# EAGLE board schema_mpb1_1 (EAGLE 9.0.1)
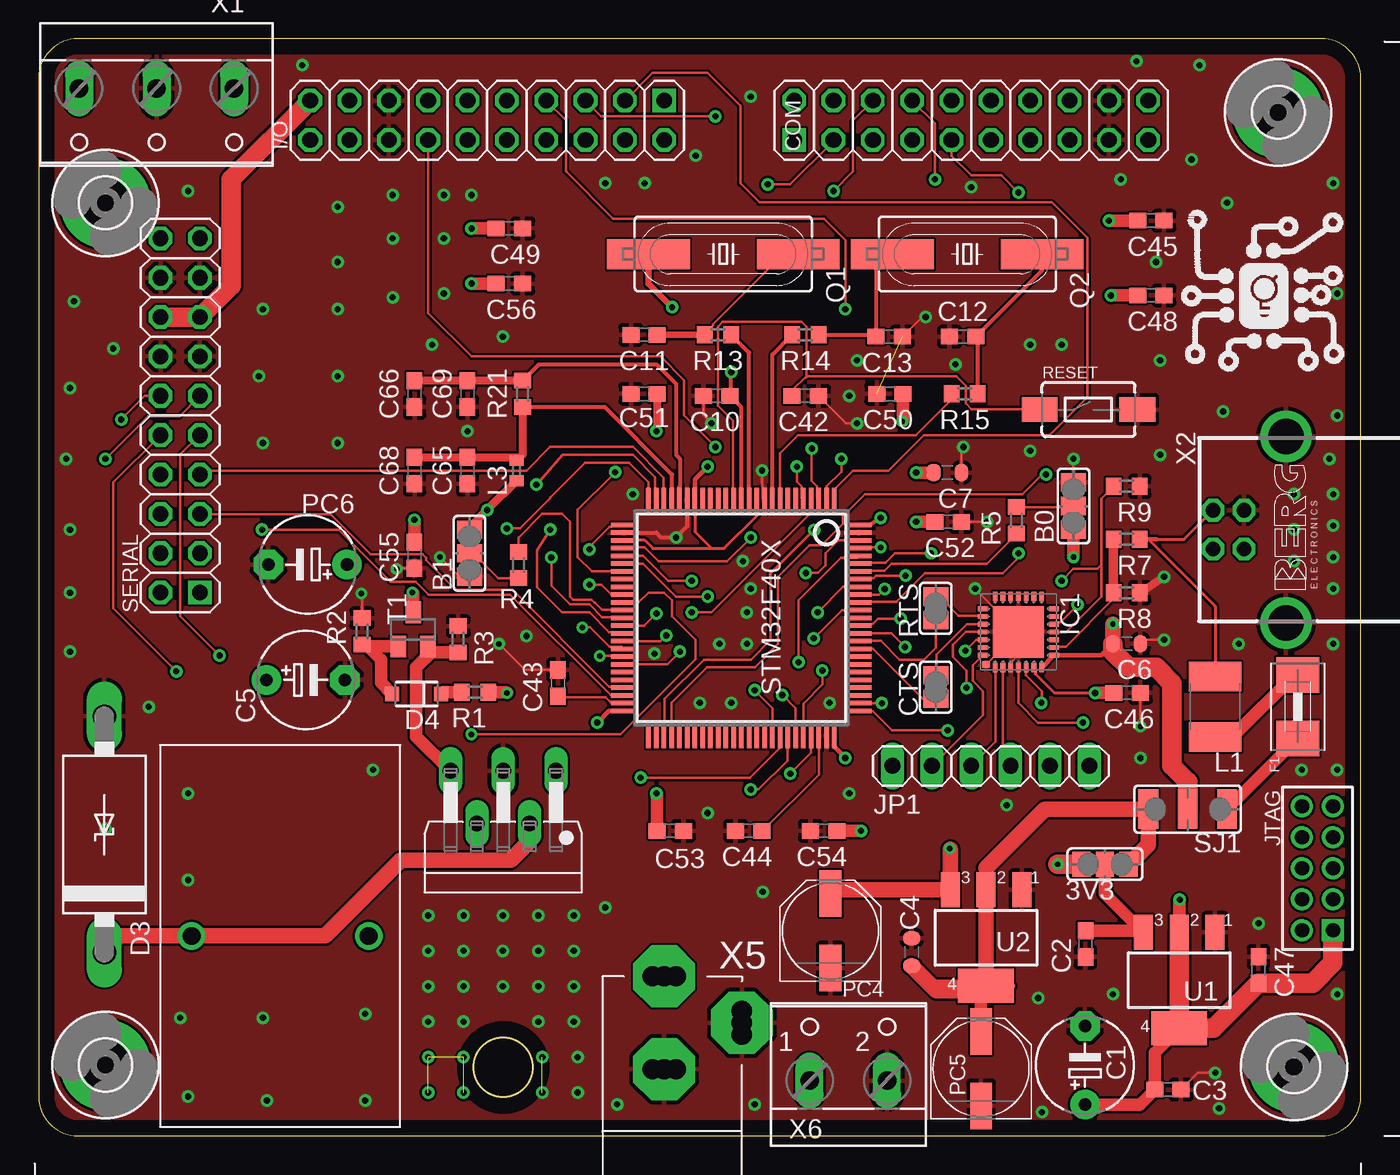
[diagram p0: board, top side]
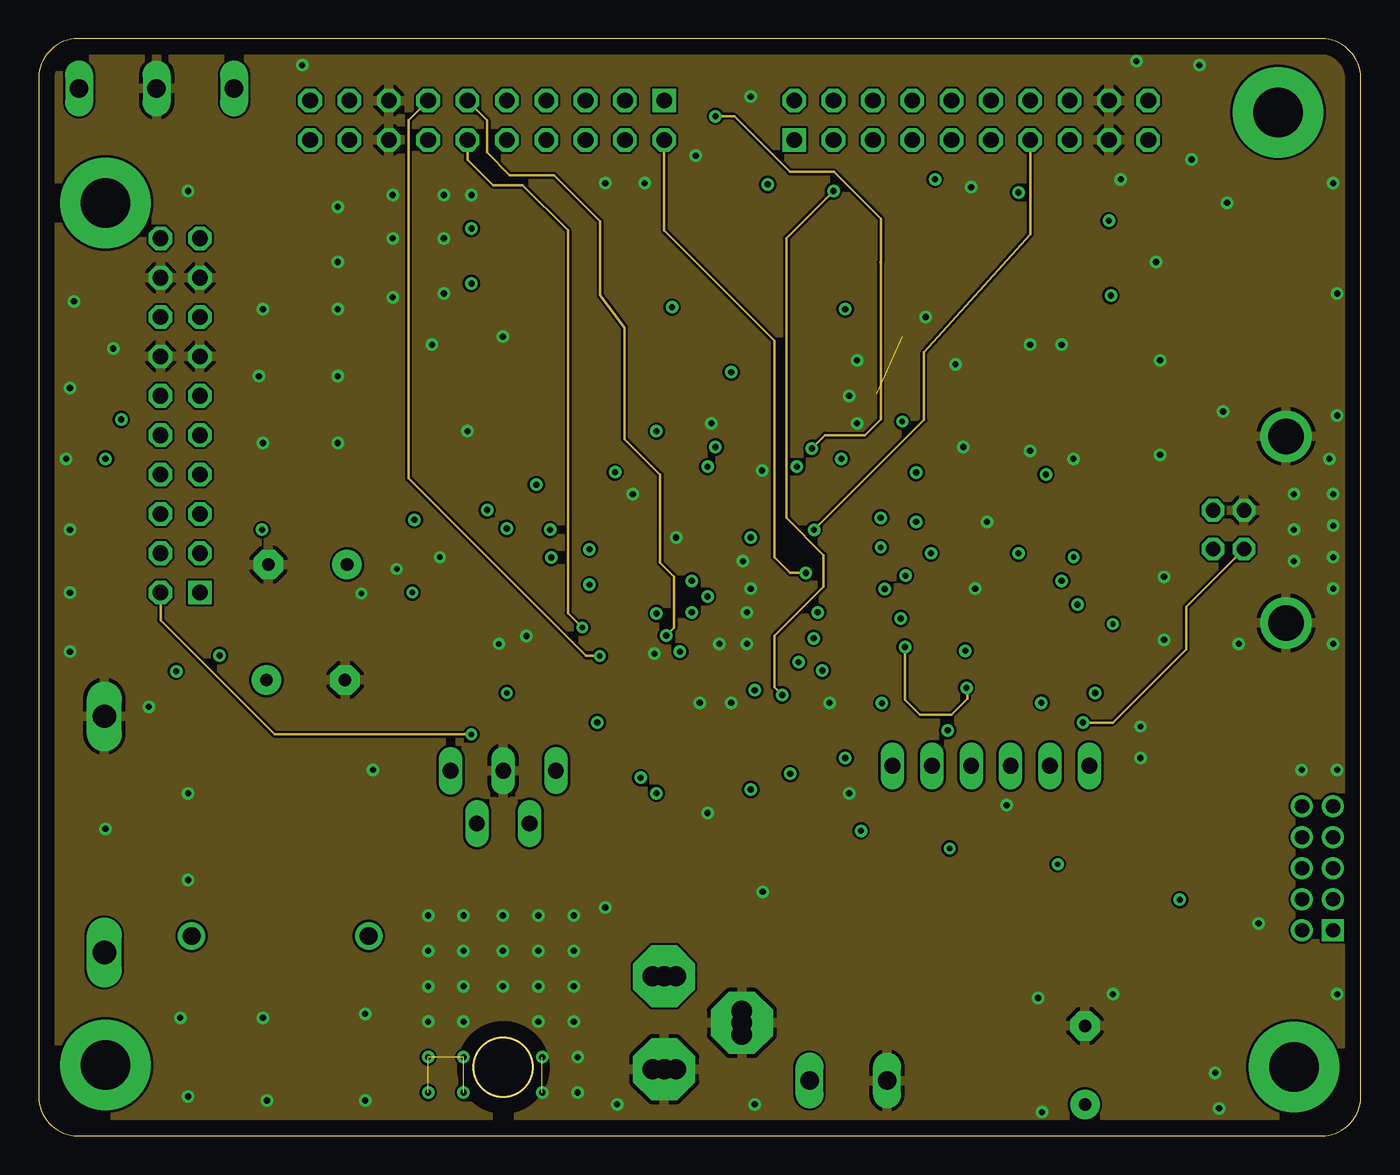
[diagram p1: board, inner layer GND]
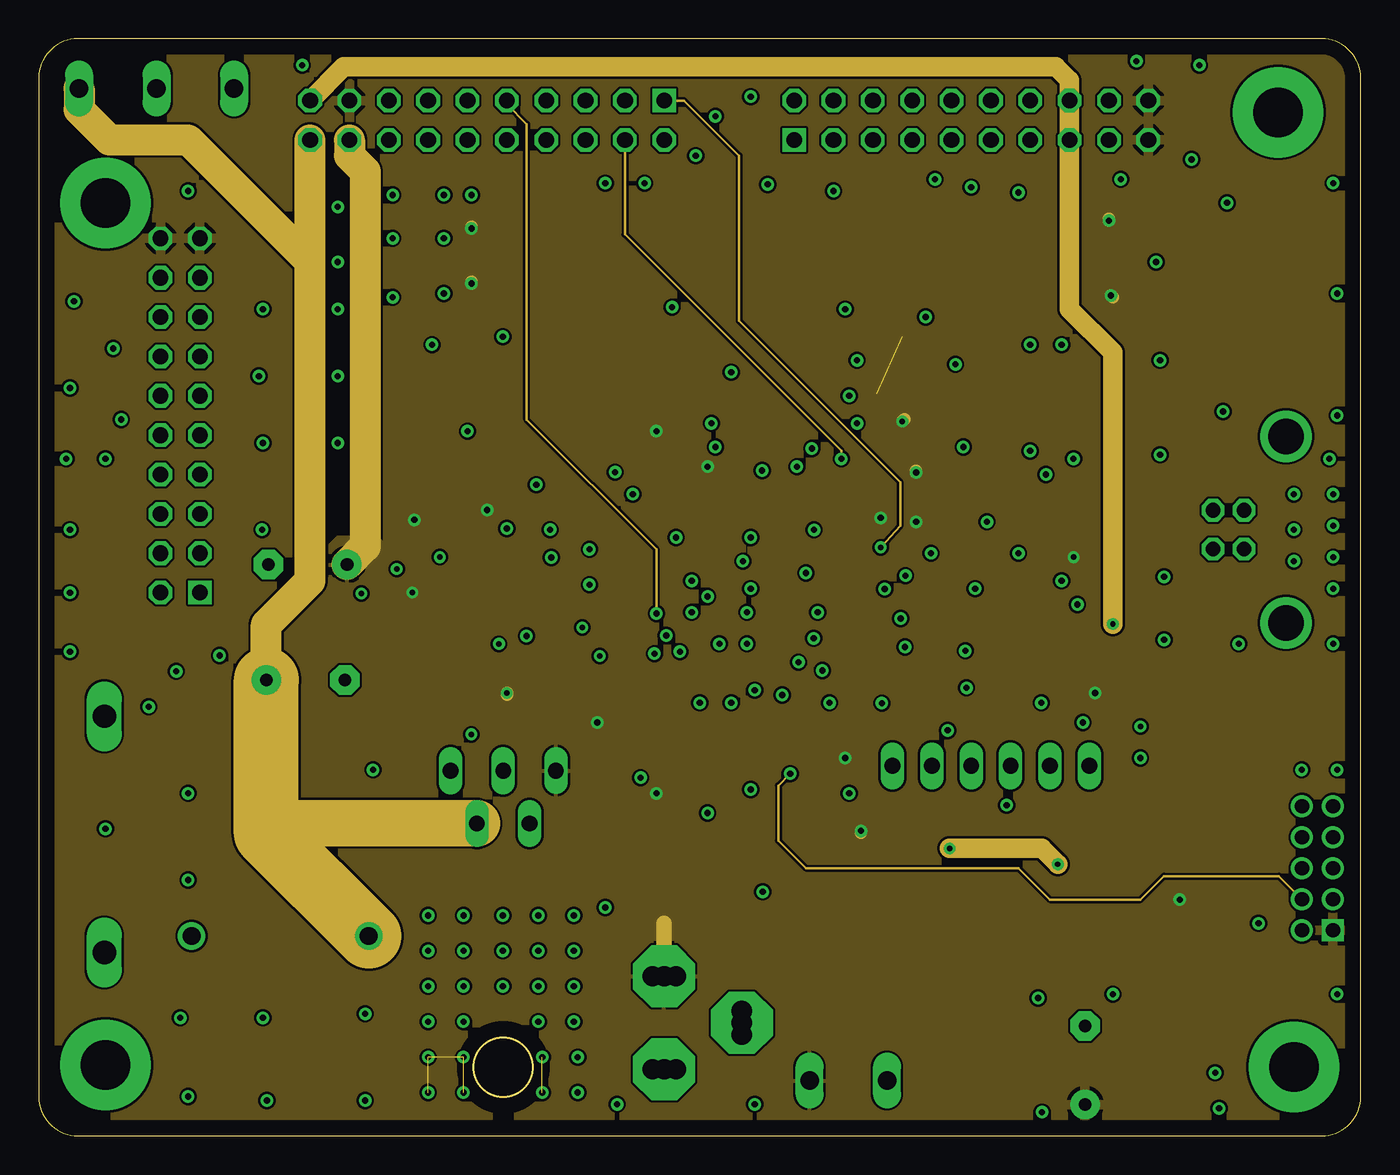
[diagram p2: board, inner layer 3.3V]
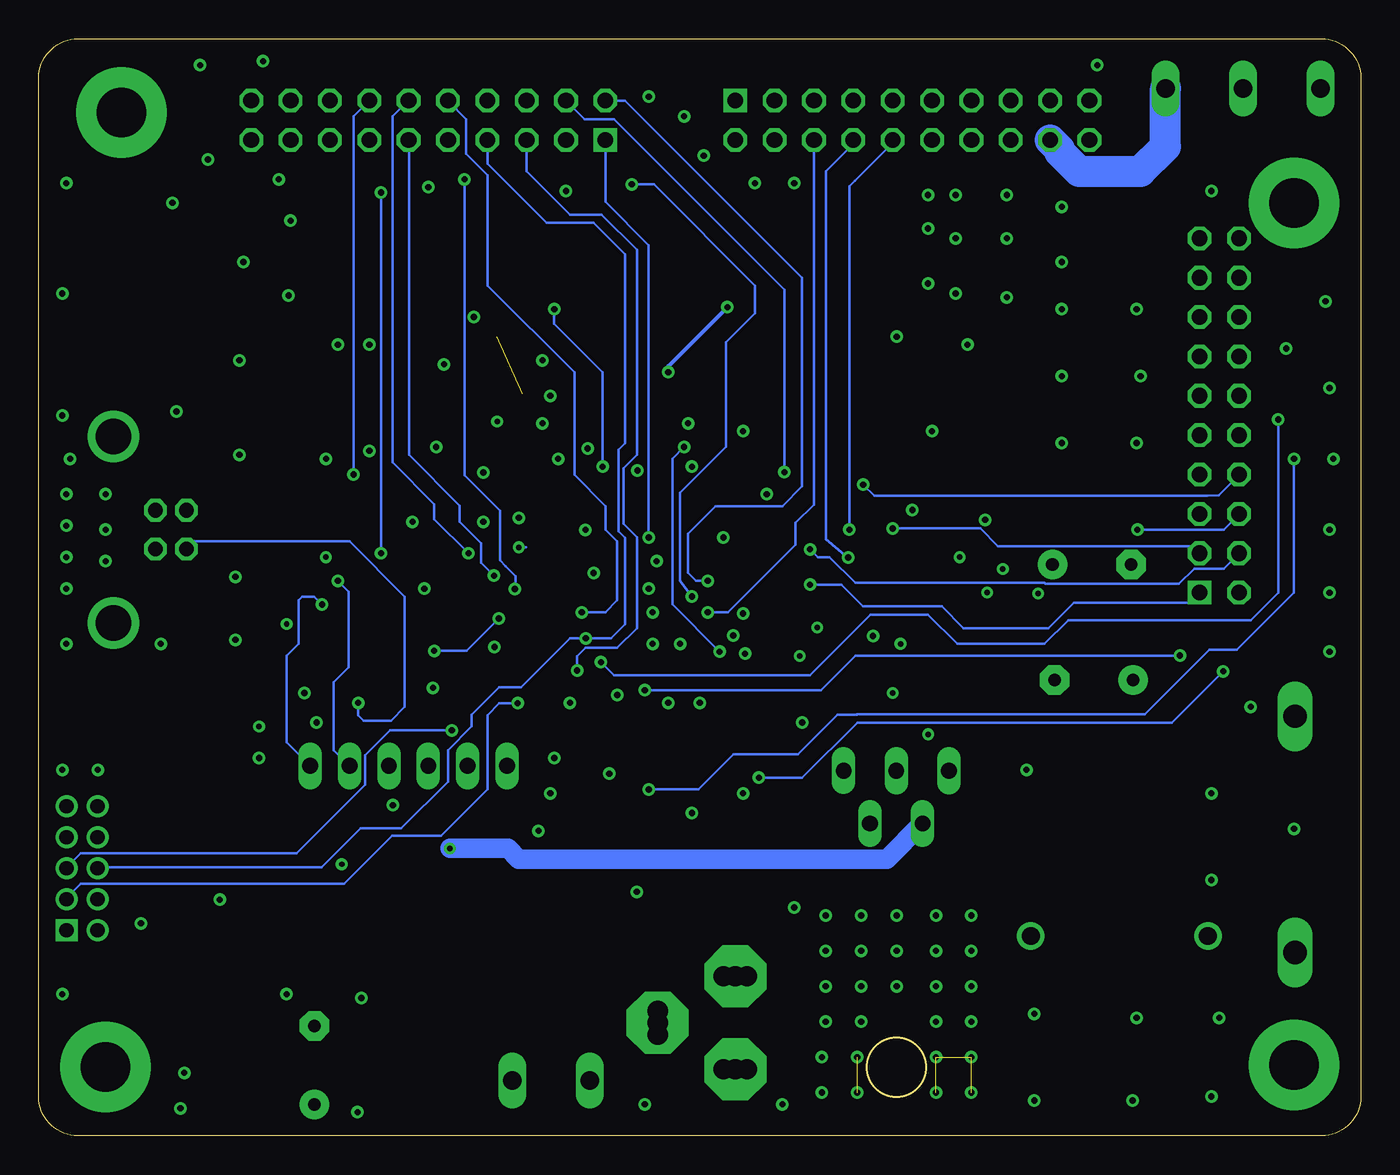
[diagram p3: board, bottom side, seen from below]

Size 85.33 x 70.79 mm. Coordinates in mm from the lower left corner, seen from the top.
Outline: 0,68.25 0,2.54 arc90 2.54,0 82.79,0 arc90 85.33,2.54 85.33,68.25 arc90 82.79,70.79 2.54,70.79 arc90 0,68.25
Copper layers (1+2*15+16): Top 0.035mm / dielectric 0.18mm / GND 0.017mm / dielectric 1.12mm / 3.3V 0.017mm / dielectric 0.18mm / Bottom 0.035mm
Design rules "default *": minimum track width 6mil, minimum drill 0.35mm, track to track 6mil, track to pad 6mil, pad to pad 6mil, via to via 6mil, smd to smd 6mil, copper to edge 40mil, drill to drill 6mil, minimum pad ring 10mil, minimum via ring 8mil, stop-mask expansion 4mil, vias tented up to drill 0mil, thermal gap 10mil
Net classes: 1 power: width 0.152 mm, drill 0.152 mm, clearance 0.152 mm; 2 gnd: width 0.152 mm, drill 0.152 mm, clearance 0.152 mm; 3 power usb: width 0.152 mm, drill 0.152 mm, clearance 0.152 mm

## Footprints (pad centres in the part's own frame; a part is rotated, then mirrored left to right if it is on the bottom)
SJ_2 = smd 1.168 x 1.6: 1 -1.524,0; 2 0,0; 3 1.524,0
E5-6 = drill 0.813 pad 1.905: + -2.54,0 | drill 0.813 pad 1.905 octagon: - 2.54,0
C0603 = smd 1.1 x 1: 1 -0.85,0; 2 0.85,0
C0603-ROUND = smd 0.898 x 1.1: 1 -0.889,0; 2 0.889,0
2X10 = drill 1.016 square: 1 -11.43,-1.27 | drill 1.016 octagon: 2 -11.43,1.27; 3 -8.89,-1.27; 4 -8.89,1.27; 5 -6.35,-1.27; 6 -6.35,1.27; 7 -3.81,-1.27; 8 -3.81,1.27; 9 -1.27,-1.27; 10 -1.27,1.27; 11 1.27,-1.27; 12 1.27,1.27; 13 3.81,-1.27; 14 3.81,1.27; 15 6.35,-1.27; 16 6.35,1.27; 17 8.89,-1.27; 18 8.89,1.27; 19 11.43,-1.27; 20 11.43,1.27
SJ = smd 1.168 x 1.6: 1 -0.762,0; 2 0.762,0
C4111-15 = drill 1.499 long: A 7.62,0; C -7.62,0
SOD-123 = smd 0.9 x 0.95: A 1.575,0; C -1.575,0
1812 = smd 2.286 x 2.794: 1 -2.046,0; 2 2.046,0
3,2-PAD = drill 3.2 pad 5.842: B3,2 0,0
MLP28 = smd 0.6 x 0.3: 1 -2.3,1.5; 2 -2.3,1; 3 -2.3,0.5; 4 -2.3,0; 5 -2.3,-0.5; 6 -2.3,-1; 7 -2.3,-1.5; 15 2.3,-1.5; 16 2.3,-1; 17 2.3,-0.5; 18 2.3,0; 19 2.3,0.5; 20 2.3,1; 21 2.3,1.5 | smd 0.3 x 0.6: 8 -1.5,-2.3; 9 -1,-2.3; 10 -0.5,-2.3; 11 0,-2.3; 12 0.5,-2.3; 13 1,-2.3; 14 1.5,-2.3; 22 1.5,2.3; 23 1,2.3; 24 0.5,2.3; 25 0,2.3; 26 -0.5,2.3; 27 -1,2.3; 28 -1.5,2.3 | smd 3.3 x 3.3: EXP 0,0 | smd 0.435 x 0.435: M -2.103,2.103
1X06 = drill 1.016 long: 1 -6.35,0; 2 -3.81,0; 3 -1.27,0; 4 1.27,0; 5 3.81,0; 6 6.35,0
2X05M = drill 0.914 square: 1 -4,-1 | drill 0.914: 2 -4,1; 3 -2,-1; 4 -2,1; 5 0,-1; 6 0,1; 7 2,-1; 8 2,1; 9 4,-1; 10 4,1
L1812 = smd 1.9 x 3.4: 1 -1.95,0; 2 1.95,0
KM-4.0 = drill 1.143 pad 1.778: P$1 -5.715,0; P$2 5.715,0
0402 = smd 0.7 x 0.9: 1 -0.65,0; 2 0.65,0
TO220-5_STAGGERED = drill 1.016 long: P$1 -3.396,-3.404; P$2 -1.7,-0.002; P$3 0.004,-3.4; P$4 1.7,0.002; P$5 3.404,-3.396
PANASONIC_D = smd 3 x 1.4: + 2.4,0; - -2.4,0
HC49UP = smd 5.334 x 1.93: 1 -4.826,0; 2 4.826,0
R0603 = smd 1 x 1.1: 1 -0.85,0; 2 0.85,0
TACTILE-SWITCH-1101NE = smd 2.3 x 1.6: 1 -3.15,0; 2 3.15,0
PAD-JUMPER-3-NO_YES_SILK_FULL_BOX_WIDE_SPACING = smd 1.27 x 2.54: 1 -2.54,0; 2 0,0; 3 2.54,0
SOT23 = smd 1 x 1.4: 1 -0.95,-1.1; 2 0.95,-1.1; 3 0,1.1
SOT223 = smd 1.219 x 2.235: 1 -2.311,-3.099; 2 0,-3.099; 3 2.311,-3.099 | smd 3.6 x 2.2: 4 0,3.099
LQFP100 = smd 1.6 x 0.3: 1 -7.6,6; 2 -7.6,5.5; 3 -7.6,5; 4 -7.6,4.5; 5 -7.6,4; 6 -7.6,3.5; 7 -7.6,3; 8 -7.6,2.5; 9 -7.6,2; 10 -7.6,1.5; 11 -7.6,1; 12 -7.6,0.5; 13 -7.6,0; 14 -7.6,-0.5; 15 -7.6,-1; 16 -7.6,-1.5; 17 -7.6,-2; 18 -7.6,-2.5; 19 -7.6,-3; 20 -7.6,-3.5; 21 -7.6,-4; 22 -7.6,-4.5; 23 -7.6,-5; 24 -7.6,-5.5; 25 -7.6,-6; 51 7.6,-6; 52 7.6,-5.5; 53 7.6,-5; 54 7.6,-4.5; 55 7.6,-4; 56 7.6,-3.5; 57 7.6,-3; 58 7.6,-2.5; 59 7.6,-2; 60 7.6,-1.5; 61 7.6,-1; 62 7.6,-0.5; 63 7.6,0; 64 7.6,0.5; 65 7.6,1; 66 7.6,1.5; 67 7.6,2; 68 7.6,2.5; 69 7.6,3; 70 7.6,3.5; 71 7.6,4; 72 7.6,4.5; 73 7.6,5; 74 7.6,5.5; 75 7.6,6 | smd 0.3 x 1.6: 26 -6,-7.6; 27 -5.5,-7.6; 28 -5,-7.6; 29 -4.5,-7.6; 30 -4,-7.6; 31 -3.5,-7.6; 32 -3,-7.6; 33 -2.5,-7.6; 34 -2,-7.6; 35 -1.5,-7.6; 36 -1,-7.6; 37 -0.5,-7.6; 38 0,-7.6; 39 0.5,-7.6; 40 1,-7.6; 41 1.5,-7.6; 42 2,-7.6; 43 2.5,-7.6; 44 3,-7.6; 45 3.5,-7.6; 46 4,-7.6; 47 4.5,-7.6; 48 5,-7.6; 49 5.5,-7.6; 50 6,-7.6; 76 6,7.6; 77 5.5,7.6; 78 5,7.6; 79 4.5,7.6; 80 4,7.6; 81 3.5,7.6; 82 3,7.6; 83 2.5,7.6; 84 2,7.6; 85 1.5,7.6; 86 1,7.6; 87 0.5,7.6; 88 0,7.6; 89 -0.5,7.6; 90 -1,7.6; 91 -1.5,7.6; 92 -2,7.6; 93 -2.5,7.6; 94 -3,7.6; 95 -3.5,7.6; 96 -4,7.6; 97 -4.5,7.6; 98 -5,7.6; 99 -5.5,7.6; 100 -6,7.6
W237-103 = drill 1.194 long: 1 -5,-1.29; 2 0,-1.29; 3 5,-1.29
PN61729-S = drill 0.95 octagon: 1 1.25,4.71; 2 -1.25,4.71; 3 -1.25,2.71; 4 1.25,2.71 | drill 2.3 pad 2.9: S1 -6.02,0; S2 6.02,0
POWERSUPPLY_DC-21MM = drill 1.3 pad 4 octagon: 1 -5.08,-3.353; 2 -0.076,-6.35; 3 -0.076,-0.356 | drill 1.3: 4 -5.08,-4.115; 5 -5.08,-2.591; 6 -0.838,-0.356; 7 0.686,-0.356; 8 -0.838,-6.35; 9 0.686,-6.35
W237-102 = drill 1.194 long: 1 -2.5,-1.27; 2 2.5,-1.27

## Placement (x,y rotation side)
3V3  [SJ_2]  68.82,17.53 180 top
B0  [SJ_2]  66.79,40.64 90 top
B1  [SJ_2]  27.8,37.59 270 top
C1  1000uF  [E5-6]  67.53,4.56 90 top
C2  47uF  [C0603]  67.56,12.39 270 top
C3  47uF  [C0603]  72.88,2.98 0 top
C4  100n  [C0603-ROUND]  56.33,11.86 270 top
C5  1000uF 25V  [E5-6]  17.23,29.42 0 top
C6  1uF  [C0603-ROUND]  70.22,31.75 0 top
C7  100nF  [C0603-ROUND]  58.66,42.8 0 top
C10  20pF  [C0603]  43.77,47.75 180 top
C11  20pF  [C0603]  39.07,51.69 180 top
C12  2pF  [C0603]  59.64,51.56 180 top
C13  2pF  [C0603]  54.89,51.56 0 top
C42  100nF  [C0603]  49.48,47.75 180 top
C43  100nF  [C0603]  33.52,29.21 90 top
C44  100nF  [C0603]  45.84,19.68 180 top
C45  100nF  [C0603]  71.78,59.05 0 top
C46  100nF  [C0603]  70.26,28.57 0 top
C47  100nF  [C0603]  78.73,10.71 90 top
C48  100nF  [C0603]  71.78,54.23 0 top
C49  100nF  [C0603]  30.38,58.55 0 top
C50  100nF  [C0603]  54.94,47.88 180 top
C51  100nF  [C0603]  39.07,47.88 180 top
C52  100nF  [C0603]  58.7,39.62 0 top
C53  100nF  [C0603]  40.76,19.68 0 top
C54  100nF  [C0603]  50.66,19.68 180 top
C55  100nF  [C0603]  24.25,37.47 270 top
C56  100nF  [C0603]  30.38,54.99 0 top
C65  100nF  [C0603]  27.68,42.93 270 top
C66  100nF  [C0603]  24.25,47.88 270 top
C68  1uF  [C0603]  24.25,42.93 270 top
C69  1uF  [C0603]  27.68,47.88 270 top
COM  [2X10]  60.19,65.53 0 top
CTS  [SJ]  57.9,28.96 270 top
D3  [C4111-15]  4.24,19.45 90 top
D4  27V  [SOD-123]  24.39,28.5 180 top
F1  500mA  [1812]  81.27,27.69 90 top
H1  MOUNT-PAD-ROUND3.2  [3,2-PAD]  81.02,4.45 90 top
H2  MOUNT-PAD-ROUND3.2  [3,2-PAD]  4.31,4.57 90 top
H3  MOUNT-PAD-ROUND3.2  [3,2-PAD]  4.31,60.2 90 top
H4  MOUNT-PAD-ROUND3.2  [3,2-PAD]  80,66.04 90 top
I/O  [2X10]  28.95,65.53 180 top
IC1  CP2102  [MLP28]  63.24,32.51 90 top
JP1  [1X06]  61.46,23.88 180 top
JTAG  [2X05M]  82.54,17.27 90 top
L1  [L1812]  75.94,27.69 90 top
L2  220uH 50Hz  [KM-4.0]  15.58,12.9 0 top
L3  BLM15HB121SN1  [0402]  30.85,42.93 90 top
LM2576-12V1  [TO220-5_STAGGERED]  29.98,20.16 180 top
PC4  47u  [PANASONIC_D]  51.11,13.23 90 top
PC5  47u  [PANASONIC_D]  60.83,4.34 90 top
PC6  100uF 25V  [E5-6]  17.36,36.86 180 top
Q1  8M  [HC49UP]  44.19,56.9 0 top
Q2  32.768kHz  [HC49UP]  59.93,56.9 0 top
R1  20k  [R0603]  28.17,28.63 0 top
R2  10k  [R0603]  20.87,32.55 270 top
R3  20k  [R0603]  27.08,32.04 270 top
R4  10K  [R0603]  30.98,36.83 90 top
R5  10K  [R0603]  63.11,39.71 270 top
R7  4k7  [R0603]  70.22,38.48 180 top
R8  10k  [R0603]  70.22,35.05 180 top
R9  10k  [R0603]  70.22,41.91 180 top
R13  390  [R0603]  43.84,51.69 0 top
R14  0  [R0603]  49.48,51.69 180 top
R15  0  [R0603]  59.77,47.88 180 top
R21  0  [R0603]  31.23,47.88 270 top
RESET  SWITCH-MOMENTARY-2SMD-1101NE  [TACTILE-SWITCH-1101NE]  67.76,46.86 0 top
RTS  [SJ]  57.9,34.04 270 top
SERIAL  [2X10]  9.13,46.48 90 top
SJ1  JUMPER-PAD-3-NO  [PAD-JUMPER-3-NO_YES_SILK_FULL_BOX_WIDE_SPACING]  74.16,21.08 180 top
T1  [SOT23]  24.17,32.68 0 top
U1  NCP1117ST33T3G  [SOT223]  73.61,10.04 180 top
U2  NCP1117ST50T3G  [SOT223]  61.15,12.78 180 top
U$2  STM32F40XSTM32D40X  [LQFP100]  45.35,33.42 270 top
X1  [W237-103]  7.61,66.29 180 top
X2  PN61729-S  [PN61729-S]  80.51,39.12 90 top
X5  POWERSUPPLY_DC21MMX  [POWERSUPPLY_DC-21MM]  40.3,3.94 180 top
X6  [W237-102]  52.26,4.84 0 top

## Library data of the parts
3V3 B0 B1 CTS RTS = jumper
C1 C5 F1 PC6 = adafruit
C2 C3 L1 PC4 PC5 R1-R3 = rcl
C4 C6 C7 X5 = SmartPrj
C10-C13 C42-C56 C65 C66 C68 C69 R7-R9 R13-R15 R21 = resistor
COM I/O JTAG SERIAL = pinhead-2
D3 = diode
D4 = SparkFun-DiscreteSemi; PROD_ID: DIO-12440; VALUE: 16V
H1-H4 = holes
IC1 = silabs-2
JP1 = pinhead
L2 = inductor_Noyle
L3 = inductors
LM2576-12V1 = LM2576
Q1 Q2 = crystal; OC_FARNELL: unknown; OC_NEWARK: unknown
R4 R5 = rcl; SPICEPREFIX: R
RESET = SparkFun-Electromechanical; PROD_ID: SWCH-00815
SJ1 = SparkFun-Passives
T1 = semicon-smd-ipc
U1 U2 = linear
U$2 = stm32f
X1 = con-wago-500; MPN: 237-103; OC_FARNELL: unknown; OC_NEWARK: 18M7116
X2 = con-berg; OC_FARNELL: unknown; OC_NEWARK: unknown
X6 = con-wago-500; MPN: 237-102; OC_FARNELL: unknown; OC_NEWARK: 70K9898

## Nets
3.3V [power]: B0.1 B1.1 C1.+ C3.1 C7.1 C45.1 C46.1 C47.1 C48.1 C49.1 C50.1 C51.1 C52.1 C53.1 C54.1 C55.1 C56.1 COM.19 COM.20 I/O.17 IC1.6 JTAG.1 L3.1 SERIAL.19 SERIAL.20 U1.2 U1.4 U$2.11 U$2.19 U$2.28 U$2.50 U$2.75 U$2.100
+5V [power usb]: C6.1 COM.15 COM.16 I/O.19 IC1.7 IC1.8 SERIAL.15 SERIAL.16 SJ1.2
+12V: 3V3.3 C5.+ I/O.20 L2.P$2 LM2576-12V1.P$4 PC4.+ U2.3 X1.3
BOOT0: R5.2 U$2.94
BOOT1: R4.2 U$2.37
CAN1_RX: COM.6 U$2.70
CAN1_TX: COM.5 U$2.71
ESP_RX: COM.8 U$2.91
ESP_TX: COM.7 JTAG.6 U$2.89
ETH_MISO: COM.3 U$2.31
ETH_MOSI: COM.4 U$2.32
ETH_SCK: COM.2 U$2.30
ETH_SS: COM.1 U$2.29
GND [gnd]: B0.3 B1.3 C1.- C2.2 C3.2 C4.1 C5.- C6.2 C7.2 C10.2 C11.2 C12.2 C13.2 C42.1 C43.2 C44.2 C45.2 C46.2 C47.2 C48.2 C49.2 C50.2 C51.2 C52.2 C53.2 C54.2 C55.2 C56.2 C65.2 C66.2 C68.2 C69.2 COM.17 COM.18 D3.A I/O.15 I/O.16 IC1.3 IC1.EXP IC1.M LM2576-12V1.P$3 PC4.- PC5.- PC6.- R2.1 R3.1 R8.1 R9.1 RESET.2 SERIAL.13 SERIAL.14 SERIAL.17 SERIAL.18 U1.1 U2.1 U$2.10 U$2.20 U$2.27 U$2.74 U$2.99 X1.2 X2.4 X2.S1 X2.S2 X5.1 X5.3 X6.2
N$1: D3.C L2.P$1 LM2576-12V1.P$2
N$2: D4.A R2.2 T1.1
N$3: D4.C R1.1
N$4 [gnd]: LM2576-12V1.P$5 R3.2 T1.2
N$5: B1.2 R4.1
N$6: B0.2 R5.1
N$8: IC1.9 R7.2 R8.2
N$9: C11.1 Q1.2 R13.1
N$10: C12.1 Q2.2 R15.1
N$11: IC1.2 JP1.3
N$12: C13.1 Q2.1 R14.1
N$13: IC1.5 X2.2
N$14: IC1.4 X2.3
N$15: JTAG.9
N$16: C44.1 U$2.73
N$17: L1.2 R7.1 X2.1
N$18: F1.2 L1.1
N$19: IC1.1 JP1.4
N$20: C43.1 U$2.49
N$21: IC1.11 JP1.2 R9.2
N$24: JTAG.8
N$25: JTAG.10
N$26: IC1.12 JP1.1
N$27: IC1.28 JP1.5
N$41: CTS.1 IC1.24
N$44: IC1.23 RTS.1
N$45: 3V3.2 C2.1 U1.3
NRF_RX: COM.11 U$2.93
NRF_TX: COM.10 U$2.92
PB4: COM.9 U$2.90
PB8: COM.12 U$2.95
PB12: U$2.51
PB13: U$2.52
PC0: U$2.15
PC1: U$2.16
PC2: U$2.17
PC3: U$2.18
PC4: U$2.33
PC5: U$2.34
PC6: U$2.63
PC7: U$2.64
PC13: U$2.7
PC14: R15.2 U$2.8
PC15: R14.2 U$2.9
PD0: U$2.81
PD1: U$2.82
PD7: U$2.88
PD8: U$2.55
PD9: U$2.56
PD10: U$2.57
PD11: U$2.58
PD12: U$2.59
PD13: U$2.60
PD14: U$2.61
PD15: U$2.62
PE0: I/O.1 U$2.97
PE1: I/O.2 U$2.98
PE2: I/O.3 U$2.1
PE3: I/O.4 U$2.2
PE4: I/O.5 U$2.3
PE5: I/O.6 U$2.4
PE6: I/O.7 U$2.5
PE7: I/O.8 U$2.38
PE8: I/O.9 U$2.39
PE9: I/O.10 U$2.40
PE10: I/O.11 U$2.41
PE11: I/O.12 U$2.42
PE12: I/O.13 U$2.43
PE13: I/O.14 U$2.44
PE14: U$2.45
PE15: U$2.46
PH0: R13.2 U$2.12
PH1: C10.1 Q1.1 U$2.13
REG_5V: 3V3.1 C4.2 PC5.+ SJ1.3 U2.2 U2.4
RESET: C42.2 RESET.1 U$2.14
RESET#: JTAG.7
RX1: SERIAL.2 U$2.36
RX2: SERIAL.4 U$2.26
RX3: SERIAL.6 U$2.48
RX4: SERIAL.8 U$2.24
RX5: SERIAL.10 U$2.68
RX6: SERIAL.12 U$2.96
SD_CMD: U$2.83
SD_D0: U$2.65
SD_D1: U$2.66
SD_D2: U$2.78
SD_D3: U$2.79
SD_SCK: U$2.80
TCK/SWCLK: JTAG.5 U$2.76
TDI: JTAG.3 U$2.77
TMS/SWDIO: JTAG.4 U$2.72
TRST: JTAG.2
TX1: SERIAL.1 U$2.35
TX2: SERIAL.3 U$2.25
TX3: SERIAL.5 U$2.47
TX4: SERIAL.7 U$2.23
TX5: SERIAL.9 U$2.67
TX6: SERIAL.11 U$2.69
USART2_CTS: CTS.2 U$2.84
USART2_RTS: RTS.2 U$2.85
USART2_RX: IC1.26 U$2.87
USART2_TX: IC1.25 U$2.86
USB_OTG_HS_DM: COM.13 U$2.53
USB_OTG_HS_DP: COM.14 U$2.54
VBAT: U$2.6
VDDA: C65.1 C68.1 L3.2 R21.2 U$2.22
VIN [power]: I/O.18 LM2576-12V1.P$1 PC6.+ R1.2 T1.3 X1.1 X5.2 X6.1
VREF+: C66.1 C69.1 R21.1 U$2.21
VUSB2: F1.1 SJ1.1

## Tracks (layer width: path | path; a pad name or v marks a point on that pad's centre or on a via)
3.3V  (via drill 0.35, 0.4)
  Top 0.152: U$2.11
  Top 0.203: 43.42,37.91 44.25,37.91 46.34,40.01 U$2.11 | U$2.19 42.35,38.98 43.42,37.91 | 38.6,38.42 39.12,38.42 39.64,37.91 43.42,37.91 | IC1.6 64.33,30.12 64.33,29.81 65.56,28.57 v68.19,28.57
  Top 0.254: 38.6,38.42 U$2.28
  Top 0.305: IC1.6 64.25,30.2 | U$2.100 53.64,39.42 v54.35,39.88 | U$2.75 51.35,25.09 v52.06,24.38 | U$2.50 36.81,27.42 v36.06,26.67 | U$2.19 42.35,42.36 v43.17,43.18
  Top 0.508: C51.1 39.92,46.18 v39.87,45.47 | L3.1 v28.95,40.39 27.8,39.24 B1.1
  Top 0.813: C1.+ 71.07,2.02 C3.1 72.03,5.36 U1.4 | C46.1 v68.19,28.57 | U1.2 73.61,15.2 v73.65,15.24 | B0.1 v66.79,37.34 | C52.1 v56.63,39.62 | C7.1 v56.63,42.8 | C50.1 55.79,46.15 v55.74,46.1 | C54.1 v53.08,19.68 | C53.1 39.91,22.06 v39.87,22.1 | C55.1 v24.25,39.75 | C56.1 v27.93,54.99 | C49.1 v27.93,58.55 | C48.1 v69.2,54.23 | C45.1 v69.08,59.05
  Top 1.27: U1.2 U1.4 75.81,6.94 C47.1 82.24,9.86 83.54,11.16 JTAG.1
  3.3V 0.508: v39.87,45.47 39.74,45.34
  3.3V 0.813: v56.63,42.8 56.63,42.93 | v55.74,46.1 55.87,46.23 | v53.08,19.68 53.08,19.56 | v27.93,54.99 27.93,55.12 | v27.93,58.55 27.93,58.67 | v69.2,54.23 69.33,54.1 | v69.08,59.05 69.08,59.18
  pour 3.3V: 84.95,67.94 84.95,2.92 arc-90 82.41,0.38 2.91,0.38 arc-90 0.37,2.92 0.37,67.94 arc-90 2.91,70.48 82.41,70.48 arc-90
+5V  (via drill 0.35)
  Top 0.305: C6.1 68.59,31.01 IC1.8 IC1.7
  Top 1.016: C6.1 v69.33,33.02
  Top 1.27: C6.1 69.33,31.24 70.35,30.23 72.13,30.23 73.14,29.21 73.14,23.88 74.16,22.86 SJ1.2 | I/O.19 12.44,61.72 12.44,54.86 SERIAL.15 SERIAL.16
  3.3V 0.813: COM.15 COM.16
  3.3V 1.27: v69.33,33.02 69.33,50.55 66.54,53.34 COM.15 66.54,68.1 65.66,68.97 19.69,68.97 I/O.19
+12V  (via drill 0.35)
  Top 0.813: 58.66,16.51 58.83,16.34 | 58.83,16.34 U2.3 | 58.83,16.34 58.83,18.5 v58.79,18.54
  Top 1.016: PC4.+ 51.36,15.88 U2.3 58.83,18.5
  Top 1.27: 3V3.3 v65.78,17.53
  3.3V 1.016: 17.52,63.75 I/O.20
  3.3V 1.27: v58.79,18.54 64.76,18.54 v65.78,17.53 | LM2576-12V1.P$4 23.95,20.16
  3.3V 2: C5.+ 14.69,32.99 17.52,35.81 17.52,56.39 | 17.52,56.39 I/O.20 | 17.52,56.39 9.64,64.26 4.56,64.26 2.61,66.21 X1.3
  3.3V 3: LM2576-12V1.P$4 15.35,20.16 14.69,19.5
  3.3V 4.2: L2.P$2 14.69,19.5 C5.+
  Bottom 1.27: v58.79,18.54 55.04,18.54 54.35,17.85 30.59,17.85 LM2576-12V1.P$4
BOOT0
  Top 0.152: R5.2 63.11,38.81 61.2,36.91 55.03,36.91 54.57,36.45 52.97,36.45 U$2.94
BOOT1
  Top 0.152: U$2.37 37.73,33.93 36.36,33.93 35.91,34.39 35.88,34.39 35.68,34.59 34.48,34.59 34.28,34.8 | R4.2 30.98,38.61 32.5,40.13 33.77,40.13 34.28,39.62 34.28,34.8 | 34.28,34.8
CAN1_RX  (via drill 0.4)
  Top 0.152: U$2.70 48.85,27.59 v48,28.45 | v51.3,60.96 52.57,62.23 52.57,65.53 COM.6
  GND 0.152: v48,28.45 47.49,28.96 47.49,32.26 50.66,35.43 50.66,37.47 48.25,39.88 48.25,57.91 v51.3,60.96
CAN1_TX  (via drill 0.4)
  Top 0.152: 53.81,64.26 COM.5 | U$2.71 49.35,27.89 50.59,29.12 v50.59,30.02
  Bottom 0.152: v50.59,30.02 50.59,30.94 50.03,31.5 48,31.5 46.73,32.77 46.73,38.63 47.6,39.51 47.6,43.07 46.73,43.94 46.73,57.18 49,59.45 51.04,59.45 53.84,62.24 COM.5
ESP_RX  (via drill 0.4)
  Top 0.152: v57.85,61.72 57.85,65.33 COM.8 | U$2.91 54.24,34.92 v54.6,35.28
  Bottom 0.152: v54.6,35.28 54.6,35.31 54.55,35.35 54.55,36.12 55.19,36.75 55.57,37.13 55.57,40.34 57.85,42.62 v57.85,61.72
ESP_TX  (via drill 0.4)
  Top 0.152: 52.14,33.93 52.9,33.93 U$2.89 51.85,33.92 v50.03,32.1
  Bottom 0.152: JTAG.6 81.47,17.32 67.07,17.32 64.54,19.85 61.93,19.85 58.92,22.86 58.92,24.89 57.39,26.42 57.39,27.18 55.62,28.96 54.19,28.96 51.04,32.1 v50.03,32.1 48.4,32.1 47.49,33.02 47.49,38.61 47.91,39.03 47.91,44.29 47.49,44.7 47.49,56.9 49.52,58.93 52.57,58.93 56.38,62.74 COM.7
ETH_MISO  (via drill 0.4)
  Top 0.152: v47.06,61.39 48.5,61.39 51.12,64.01 51.3,64.01 COM.3 | U$2.31 38.99,36.92 41.12,34.8 v43.17,34.8
  Bottom 0.152: v47.06,61.39 45.63,61.39 39.11,54.86 39.11,53.09 40.99,51.21 40.99,44.45 43.93,41.51 43.93,35.81 v43.17,34.8
ETH_MOSI  (via drill 0.4)
  Top 0.152: v37.2,42.83 37.17,42.83 37.07,42.93 37.07,42.67 34.79,40.39 34.79,37.34 35.7,36.42 U$2.32
  Bottom 0.152: v37.2,42.83 37.2,54.59 48.2,65.58 50.1,65.58 51.3,66.78 COM.4
ETH_SCK  (via drill 0.4)
  Top 0.152: 38.6,37.42 39.02,37.42 40.63,35.81 v42.15,35.81
  Top 0.2: U$2.30 38.6,37.42
  Bottom 0.152: COM.2 47.49,66.8 36.06,55.37 36.06,41.91 37.33,40.64 41.65,40.64 43.42,38.86 43.42,36.32 42.92,35.81 v42.15,35.81
ETH_SS  (via drill 0.4)
  Top 0.152: U$2.29 37.81,37.97 39.11,37.97 39.99,37.08 44.44,37.08 v45.96,38.61
  Bottom 0.152: v45.96,38.61 45.96,57.48 48.76,60.27 COM.1
GND  (via drill 0.35, 0.4, 0.4 pad 0.55)  (2 unrouted)
  Top 0.152: 63.18,32.26 63.18,30.96 62.8,30.58 62.8,30.28 IC1.3 | 63.18,32.26 63.18,32.49 IC1.EXP v60.44,35.31 | X2.4 77.82,40.34 77.88,40.45 | R2.1 20.87,34.95 v20.82,35 | B0.3 v66.79,43.69 | U$2.10 46.73,41.14 46.73,41.92 46.69,41.95 v46.69,42.93 | C42.1 52.11,45.97 v52.82,45.97 | C43.2 31.4,30.06 v29.71,31.75 | B1.3 27.17,36.07 v25.9,37.34 | C55.2 23.14,36.62 v23.1,36.58 | C7.2 59.55,44.32 v59.68,44.45 | C52.2 v61.2,39.62 | IC1.M 62.98,32.26 63.18,32.26 | C13.2 57.01,52.83 v57.24,52.83 | C10.2 42.92,46.48 v43.42,45.97 | C46.2 v71.11,26.42 | C6.2 71.36,32 v72.63,32 | C3.2 74.81,4.06 v75.94,4.06
  Top 0.254: U$2.20 41.85,39.32 v41.14,38.61 40.18,38.61 39.87,38.92 U$2.27
  Top 0.508: R8.1 v72.63,36.07
  GND 0.152: v20.82,35 20.82,34.8 | v46.69,42.93 46.73,42.93 | v57.24,52.83 57.39,52.83
  other vias: 9.13,7.62 9.64,2.54 14.47,7.62 14.72,2.29 21.07,2.29 9.64,16.51 9.64,22.1 25.14,11.94 21.07,7.87 25.14,14.22 27.42,14.22 29.96,14.22 34.53,14.22 27.42,11.94 29.96,11.94 32.25,11.94 25.14,9.65 27.42,9.65 32.25,9.65 34.53,11.94 29.96,9.65 32.25,14.22 34.53,9.65 25.14,7.37 27.42,7.37 32.25,7.37 34.53,7.37 32.5,5.08 34.79,5.08 32.5,2.79 34.79,2.79 46.22,2.03 37.33,2.03 36.57,14.73 46.73,15.75 43.17,20.83 52.31,22.1 64.51,8.89 69.33,9.14 76.19,1.78 64.76,1.52 83.81,9.14 78.73,13.72 83.81,23.62 81.52,23.62 71.11,24.38 62.47,21.34 77.46,31.75 83.56,31.75 83.56,35.31 83.56,37.34 83.56,39.37 83.56,41.4 81.02,41.4 81.02,39.12 81.02,37.08 83.3,43.69 83.81,46.48 76.44,46.74 72.38,50.04 72.38,43.94 66.03,51.05 72.13,56.39 76.7,60.2 83.56,61.47 74.92,69.09 83.81,54.36 70.86,69.34 45.96,67.06 69.84,61.72 74.41,62.99 39.11,61.47 36.57,61.47 60.19,61.21 27.93,60.71 26.15,60.71 22.85,60.71 22.85,57.91 22.85,54.1 26.15,57.91 26.15,54.36 19.29,53.34 19.29,56.39 19.29,59.94 19.29,49.02 19.29,44.7 14.47,44.7 14.21,49.02 14.47,53.34 2.28,53.85 2.02,48.26 1.77,43.69 2.02,39.12 2.02,35.05 2.02,31.24 4.82,50.8 4.31,19.81 21.58,23.62 7.1,27.69 31.49,32.26 43.93,31.75 45.71,31.75 45.71,33.78 45.46,37.08 42.66,27.94 44.69,27.94 51.04,27.94 39.74,31.11 45.96,35.31 38.34,41.4 64,51.05 64,44.2 59.17,49.78 52.82,50.04 52.31,47.75 29.96,51.56 25.39,51.05 27.68,45.47 42.41,63.25 17.01,69.09 9.64,60.96
  pour GND: 84.95,67.94 84.95,2.92 arc-90 82.41,0.38 2.91,0.38 arc-90 0.37,2.92 0.37,67.94 arc-90 2.91,70.48 82.41,70.48 arc-90
  pour Top: 85.08,68.07 85.08,2.79 arc-90 82.54,0.25 2.78,0.25 arc-90 0.24,2.79 0.24,68.07 arc-90 2.78,70.61 82.54,70.61 arc-90
GND1  (via drill 0.4 pad 0.55)  (3 unrouted)
  other vias: 25.14,5.08 27.42,5.08 25.14,2.79 27.42,2.79
N$1
  Top 1.016: D3.C 5.2,12.9 L2.P$1 18.48,12.9 23.36,17.78 30.47,17.78 31.68,18.99 LM2576-12V1.P$2
N$2
  Top 0.813: D4.A 22.09,29.23 22.09,30.73 21.24,31.58 | R2.2 21.12,31.7 21.24,31.58 | T1.1 21.24,31.58
N$3
  Top 0.813: R1.1 26.1,28.63 D4.C
N$4
  Top 0.813: R3.2 25.51,31.19 25.43,31.28 | 25.43,31.28 T1.2 | LM2576-12V1.P$5 24.37,25.76 24.37,30.23 25.43,31.28
N$5
  Top 0.152: B1.2 28.06,37.59 29.66,35.99 30.95,35.99 R4.1
N$6
  Top 0.152: R5.1 66.69,40.56 66.77,40.64 B0.2
N$8
  Top 0.152: IC1.9 65.55,31.57 66.28,31.57 69.37,34.66 R8.2
  Top 0.61: R8.2 R7.2
N$9
  Top 0.152: R13.1 43.07,51.84 43.53,52.3 43.53,52.38 46.88,55.73 48.02,56.87 49.01,56.87 Q1.2
  Top 0.406: C11.1 R13.1
N$10
  Top 0.254: R15.1 60.62,51.44 C12.1 64.76,55.83 Q2.2
N$11
  Top 0.152: JP1.3 62.24,24.37 IC1.2
N$12
  Top 0.254: Q2.1 54.22,56.01 54.04,55.83 C13.1 53.92,51.69 R14.1
N$13  (via drill 0.4)
  Top 0.152: IC1.5 63.72,30.2 63.72,29.72 64.76,28.68 64.76,27.99 v64.71,27.94
  Bottom 0.152: X2.2 75.31,38.35 65.27,38.35 61.71,34.8 61.71,27.69 62.6,26.8 64.38,26.8 64.71,27.13 v64.71,27.94
N$14  (via drill 0.4)
  Top 0.152: v67.4,26.67 64.51,26.67 63.24,27.94 IC1.4
  GND 0.152: X2.3 74.06,34.13 74.06,31.4 69.33,26.67 v67.4,26.67
N$16
  Top 0.152: C44.1 46.73,19.68 50.35,23.31 U$2.73
N$17
  Top 0.2: 71.62,38.48 75.94,34.16 L1.2 | 72.13,38.48 73.91,38.48 X2.1
  Top 0.305: R7.1 71.62,38.48 72.13,38.48
N$18
  Top 0.813: L1.1 77.03,25.74 81.03,29.73 F1.2
N$19
  Top 0.152: IC1.1 61.74,25.42 JP1.4
N$20
  Top 0.152: C43.1 33.54,28.3 36.59,28.3 36.9,27.99 37.73,27.99 U$2.49
N$21  (via drill 0.4)
  Top 0.152: 68.59,36.86 68.59,41.1 69.36,41.86 R9.2 | IC1.11 65.55,32.49 66.28,32.49 68.59,34.8 68.59,36.86 | 68.59,36.86 68.32,36.58 66.79,36.58 v66.03,35.81
  Bottom 0.152: JP1.2 66.28,24.89 66.28,29.26 65.32,30.23 65.32,35.1 v66.03,35.81
N$26  (via drill 0.4)
  Top 0.152: IC1.12 65.66,33.13 65.93,33.13 67.05,34.25 v67.05,34.29
  Bottom 0.152: JP1.1 69.33,25.4 69.33,30.99 68.57,31.75 68.57,34.54 68.32,34.8 67.55,34.8 v67.05,34.29
N$27
  Top 0.152: JP1.5 57.7,23.88 60.95,27.13 60.95,28.7 60.3,29.35 60.3,30.38 IC1.28
N$41
  Top 0.152: CTS.1 57.93,29.74 57.93,31.04 59.9,33.01 IC1.24
N$44
  Top 0.152: IC1.23 60.9,33.55 59.38,33.55 58.16,34.77 57.93,34.77 RTS.1
N$45
  Top 0.813: 3V3.2 68.82,15.62 U1.3 71.2,13.24 C2.1
NRF_RX  (via drill 0.4)
  Top 0.152: v55.95,36.14 54.04,36.14 53.89,35.99 52.97,35.99 U$2.93
  Bottom 0.152: COM.11 61.43,64.26 61.43,43.94 58.16,40.66 58.16,39.62 56.78,38.25 56.78,36.98 v55.95,36.14
NRF_TX  (via drill 0.4)
  Top 0.152: U$2.92 51.92,35.42 v50.28,33.78
  Bottom 0.152: COM.10 58.92,66.78 57.75,65.61 57.75,63.37 56.35,61.98 56.35,54.86 50.77,49.28 50.77,42.65 48.76,40.64 48.76,39.12 48,38.35 48,34.54 48.76,33.78 v50.28,33.78
PB4  (via drill 0.4)
  Top 0.152: U$2.90 52.97,34.47 55.36,34.47 57.19,36.3 62.22,36.3 63.24,37.31 v63.24,37.59 | COM.9 58.92,63.25 60.19,61.98 62.13,61.98 v63.24,60.87
  Bottom 0.152: v63.24,37.59 v63.24,60.87
PB8  (via drill 0.4)
  Top 0.152: v57.6,37.59 55.26,37.59 54.65,36.98 52.97,36.98 U$2.95
  Bottom 0.152: COM.12 61.51,66.78 62.5,65.79 62.5,43.46 59.81,40.77 59.81,39.8 v57.6,37.59
PC14
  Top 0.152: R15.2 58.92,47.5 56.63,45.21 49.01,45.21 47.85,44.05 U$2.8
PC15
  Top 0.254: R14.2 47.35,50.41 U$2.9
PE0  (via drill 0.35)
  Top 0.152: v54.35,37.97 52.97,37.97 U$2.97
  3.3V 0.152: v54.35,37.97 55.62,39.37 55.62,42.16 45.2,52.58 45.2,63.25 41.65,66.8 I/O.1
  Bottom 0.152: 53.89,37.97 v54.35,37.97 | 40.4,66.85 I/O.1
PE1  (via drill 0.4)
  Top 0.152: U$2.98 51.62,38.42 50.79,37.59 50.79,36.83 50.28,36.32 v49.52,36.32
  GND 0.152: I/O.2 40.38,58.42 47.49,51.31 47.49,37.34 48.5,36.32 v49.52,36.32
PE2
  Top 0.152: I/O.3 39.61,68.58 43.17,68.58 45.29,66.46 45.29,61.45 46.51,60.24 65.38,60.24 67.68,57.94 67.68,47.65 65.24,45.21 57.14,45.21 54.85,42.93 52.57,42.93 51.35,41.71 U$2.1
PE3  (via drill 0.4)
  Top 0.152: U$2.2 50.85,41.91 51.81,42.87 v51.81,43.69
  3.3V 0.152: I/O.4 37.84,58.17 51.81,44.2 v51.81,43.69
PE4  (via drill 0.4)
  Top 0.152: I/O.5 35.3,66.78 36.29,65.79 v43.68,65.79 | U$2.3 50.23,41.14 50.23,41.92 49.88,42.27 49.88,44.33 v49.9,44.35
  GND 0.152: v49.9,44.35 50.77,45.21 53.33,45.21 54.35,46.23 54.35,56.34 54.32,56.36 54.35,56.39 54.35,59.18 51.32,62.21 48.48,62.21 44.9,65.79 v43.68,65.79
PE5  (via drill 0.4)
  Top 0.152: U$2.4 49.85,40.21 43.42,33.78 v42.15,33.78
  Bottom 0.152: v42.15,33.78 40.86,33.78 36.49,38.15 36.49,39.55 35.3,40.74 I/O.6
PE6  (via drill 0.4)
  Top 0.152: U$2.5 49.23,41.14 49.23,41.92 48.94,42.21 v48.94,43.18 | I/O.7 34.03,65.53 34.03,62.23 37.07,59.18 50.68,59.18 52.06,57.8 v52.06,53.34
  Bottom 0.152: v48.94,43.18 48.94,49.28 52.06,52.4 v52.06,53.34
PE7  (via drill 0.4)
  Top 0.152: U$2.38 37.73,33.48 36.36,33.48 35.55,34.29 34.28,34.29 33.09,35.48 v33.09,37.31
  Bottom 0.152: I/O.8 32.76,64.01 34.53,62.23 34.53,38.51 v33.09,37.31
PE8  (via drill 0.4)
  Top 0.152: U$2.39 39.08,32.92 v39.87,33.71
  3.3V 0.152: I/O.9 30.22,66.57 31.5,65.28 31.5,46.21 39.87,37.85 v39.87,33.71
PE9  (via drill 0.4)
  Top 0.152: U$2.40 37.73,32.49 36.82,32.49 35.54,33.77 33.78,33.77 32.17,35.38 32.17,37.77 v33.01,39.12
  Bottom 0.152: I/O.10 30.27,64.26 30.23,64.05 32.66,61.62 33.01,61.27 v33.01,39.12
PE10  (via drill 0.4)
  Top 0.152: v40.5,32.28 40.14,31.92 U$2.41
  GND 0.152: I/O.11 27.68,66.78 28.93,65.53 28.93,63.45 30.4,61.98 33.26,61.98 36.24,59 36.24,54.24 37.81,52.15 37.81,44.96 40.11,42.66 40.11,36.97 41.01,36.07 41.01,32.79 v40.5,32.28
PE11  (via drill 0.35)
  Top 0.152: U$2.42 37.63,31.54 36.86,31.54 35.6,32.8 v35.08,32.8
  GND 0.152: v35.08,32.8 34.15,33.73 34.15,58.42 31.23,61.34 29.33,61.34 27.68,62.99 I/O.12
PE12  (via drill 0.35)
  Top 0.152: v36.21,30.96 37.73,30.96 U$2.43
  GND 0.152: v36.21,30.96 35.32,30.96 23.87,42.42 23.87,65.53 I/O.13
PE13  (via drill 0.4)
  Top 0.152: U$2.44 40.57,30.42 v41.39,31.24 | v43.68,44.45 41.65,46.48 41.65,48.77 40.12,50.29 27.93,50.29 25.14,53.09 I/O.14
  Bottom 0.152: v43.68,44.45 44.44,43.69 44.44,34.29 v41.39,31.24
PH0
  Top 0.254: U$2.12 45.85,50.53 R13.2
PH1  (via drill 0.4)
  Top 0.254: U$2.13 45.35,47.02 C10.1 44.69,47.83 v44.69,49.28
  Top 0.406: v40.88,53.47 39.36,54.99 Q1.1
  Bottom 0.254: v44.69,49.28 44.69,49.66 v40.88,53.47
REG_5V
  Top 0.61: 62.73,9.68 U2.4
  Top 0.813: 60.95,6.86 PC5.+ 60.83,9.36 U2.4 57.62,9.68 C4.2 | 61.15,15.49 60.95,15.69 U2.2 61.15,17.27
  Top 1.016: 61.15,17.27 64.96,21.08 SJ1.3 71.62,18.8 3V3.1 | U2.4 61.15,15.49 | C4.2 57.94,9.36 60.83,9.36
RESET
  Top 0.152: 48.94,47.8 48.63,47.8 C42.2 48.63,48.11 49.54,49.02 | RESET.1 64.56,46.89 60.21,46.89 59.83,47.27 59.83,48.41 59.22,49.02 49.54,49.02 | 49.54,48.95 49.54,49.02 | 49.54,49.02 49.54,49.28 49.54,52.22 49.24,52.53 44.13,52.53 43.83,52.22 43.83,47.12 44.82,46.13 44.82,41.1 U$2.14
RX1  (via drill 0.35)
  Top 0.152: 7.86,35 SERIAL.2 | v27.93,25.91 37.56,25.91 42.41,30.76 42.41,32 40.88,33.53 40.88,34.54 40.38,35.05 39.36,35.05 38.73,34.42 U$2.36
  GND 0.15: 15.23,25.91 v27.93,25.91
  GND 0.152: SERIAL.2 7.86,33.27 15.23,25.91
RX2  (via drill 0.4)
  Top 0.152: U$2.26 37.07,39.42 36.95,39.3 36.86,39.3 35.55,38 v35.55,37.85
  Bottom 0.152: SERIAL.4 8.86,36.6 10.76,36.6 11.75,35.61 20.36,35.61 20.44,35.69 32.63,35.69 34.28,37.34 35.04,37.34 v35.55,37.85
RX3  (via drill 0.4)
  Top 0.152: v14.42,39.12 19.37,39.12 22.72,35.76 24.32,35.76 25.16,34.93 30.42,34.93 36.9,28.45 37.73,28.45 U$2.48
  Bottom 0.152: v14.42,39.12 8.86,39.12 7.86,40.11 SERIAL.6
RX4  (via drill 0.4)
  Top 0.152: U$2.24 39.79,41.1 39.79,42.49 38.34,43.94 33.8,43.94 v32.12,42.02
  Bottom 0.152: SERIAL.8 7.86,42.62 9.16,41.33 9.9,41.3 31.41,41.3 v32.12,42.02
RX5  (via drill 0.4)
  Top 0.152: U$2.68 47.79,25.78 47.79,24.99 45.91,23.11 v38.85,23.11 | SERIAL.10 4.82,42.16 4.82,34.04 v8.88,29.97
  Bottom 0.152: v38.85,23.11 36.06,23.11 32.5,26.67 12.18,26.67 v8.88,29.97
RX6  (via drill 0.4)
  Top 0.152: U$2.96 52.83,37.3 51.77,37.3 49.04,34.58 v49.04,30.56 | v5.32,46.23 6.85,47.75 SERIAL.12
  Bottom 0.152: v49.04,30.56 48.21,29.73 35.54,29.73 31.64,33.63 27.93,33.63 26.05,31.75 20.41,31.75 18.89,33.27 7.1,33.27 5.32,35.05 v5.32,46.23
TCK/SWCLK  (via drill 0.4)
  Top 0.152: U$2.76 52.97,27.38 53.84,27.38 55.06,26.16 v58.66,26.16
  Bottom 0.152: JTAG.5 83.53,17.32 82.62,18.24 68.67,18.24 64.25,22.66 64.25,24.56 62.65,26.16 v58.66,26.16
TDI  (via drill 0.4)
  Top 0.152: v54.42,27.91 52.97,27.91 U$2.77
  Bottom 0.152: v54.42,27.91 55.62,27.91 56.38,27.15 56.38,22.35 59.38,19.36 62.52,19.36 65.62,16.26 82.62,16.26 83.53,15.34 JTAG.3
TMS/SWDIO  (via drill 0.4)
  Top 0.152: U$2.72 49.85,24.71 v48.5,23.37
  3.3V 0.152: v48.5,23.37 47.74,22.61 47.74,19.05 49.52,17.27 63.24,17.27 65.27,15.24 71.11,15.24 72.63,16.76 80.05,16.76 JTAG.4
TX1  (via drill 0.4)
  Top 0.152: U$2.35 36.98,34.92 36.34,35.56 v35.55,35.56
  Bottom 0.152: SERIAL.1 11.06,34.39 18.53,34.39 20.16,32.77 25.64,32.77 27.04,34.16 32.12,34.16 33.52,35.56 v35.55,35.56
TX2  (via drill 0.4)
  Top 0.152: v30.22,39.19 31.05,39.19 33.01,41.15 33.01,41.17 35.27,43.43 38.09,43.43 39.35,42.17 U$2.25
  Bottom 0.152: v30.22,39.19 24.55,39.19 23.41,38.05 10.91,38.05 10.46,37.59 SERIAL.3
TX3
  Top 0.152: U$2.47 37.73,28.98 36.82,28.98 30.57,35.23 26.91,35.23 25.01,37.14 25.01,37.29 24.78,37.52 21.43,37.52 18.84,40.11 10.46,40.11 SERIAL.5
TX4
  Top 0.152: U$2.23 40.32,41.1 40.32,42.47 38.34,44.45 33.01,44.45 31.49,42.93 10.68,42.93 10.46,42.7 SERIAL.7
TX5  (via drill 0.4)
  Top 0.15: 9.13,39.88 9.13,33.53 v11.67,30.99
  Top 0.152: v46.22,28.75 46.24,28.71 47.35,27.6 U$2.67 | SERIAL.9 10.38,45.21 9.13,43.97 9.13,39.88
  Bottom 0.15: 16.75,30.97 11.69,30.97 v11.67,30.99
  Bottom 0.152: v46.22,28.75 34.84,28.75 32.62,30.97 16.75,30.97
TX6  (via drill 0.4)
  Top 0.152: 48.33,26.7 48.33,25.86 | SERIAL.11 9.08,46.43 7.05,46.43 v4.31,43.69 | 48.33,25.86 U$2.69 | v45.96,22.35 46.47,22.35 48.33,24.21 48.33,25.86
  Bottom 0.152: v45.96,22.35 42.76,22.35 40.48,24.64 36.31,24.64 33.77,27.18 32.53,27.18 32.52,27.19 13.95,27.19 9.77,31.37 7.99,31.37 4.31,35.05 v4.31,43.69
USART2_CTS
  Top 0.152: U$2.84 52.97,31.42 53.84,31.42 57.06,28.19 CTS.2
USART2_RTS
  Top 0.152: U$2.85 52.97,31.95 54.35,31.95 55.56,30.73 57.14,30.73 57.9,31.5 RTS.2
USART2_RX  (via drill 0.4)
  Top 0.152: v55.64,33.38 55.6,33.37 54.17,33.37 53.84,33.03 52.97,32.87 U$2.87 | v59.81,31.29 60.53,32.01 IC1.26
  Bottom 0.152: v59.81,31.29 58.16,31.29 57.72,31.29 v55.64,33.38
USART2_TX  (via drill 0.4)
  Top 0.152: IC1.25 60.9,32.49 60.87,32.51 59.83,32.51 58.99,31.67 58.99,30.91 59.89,30.02 v59.89,28.91 | 52.9,32.41 U$2.86 55.04,32.42 v55.92,31.54
  GND 0.152: v59.89,28.91 59.93,28.86 59.93,28.19 58.92,27.18 56.89,27.18 55.92,28.15 v55.92,31.54
USB_OTG_HS_DM  (via drill 0.4)
  Top 0.152: U$2.53 40.4,25.86 40.4,28.19 42.94,30.73 45.96,30.73 47.23,32 47.23,36.04
  Top 0.2: 47.23,36.04 47.23,36.3 v50.04,39.1
  GND 0.152: COM.13 64,58.17 57.14,50.55 57.14,46.2 v50.04,39.1
USB_OTG_HS_DP  (via drill 0.4)
  Top 0.152: U$2.54 40.86,25.86 40.86,27.94 43.14,30.23 46.22,30.23 47.73,31.74 47.73,36.08 48.11,36.46 49.75,38.1 50.54,38.1 51.92,39.49 51.92,39.99 53.33,41.4 63.49,41.4 64.76,42.67 v65.01,42.67
  Bottom 0.152: COM.14 65.01,65.79 v65.01,42.67
VDDA
  Top 0.254: R21.2 36.53,47.03 40.88,42.67 40.85,42.64 U$2.22
  Top 0.508: C68.1 C65.1 31.05,43.78 | R21.2 31.23,43.96 31.05,43.78 | 31.05,43.78 L3.2
VIN  (via drill 0.35)
  Top 0.813: R1.2 30.16,28.63 v30.22,28.57 | T1.3 24.17,35 v24.12,35.05
  3.3V 0.813: v30.22,28.57 30.22,28.45
  3.3V 1.016: X5.2 40.37,13.71 40.38,13.72
  3.3V 2: I/O.18 20.06,63.25 21.07,62.23 21.07,38.03 PC6.+
  Bottom 2: I/O.18 19.43,63.64 19.43,63.47 18.19,62.23 14.21,62.23 12.61,63.83 X1.1
  pour 3.3V: 51.55,1.52 51.55,8.89 21.83,38.61 19.29,38.61 18.28,37.59 18.28,36.07 19.55,34.8 21.58,34.8 31.99,24.38 31.99,22.61 37.84,16.76 37.84,9.14 39.36,7.62 41.9,7.62 44.69,10.41 45.96,10.41 47.74,8.64 47.74,2.03 48.76,1.02 51.04,1.02
VREF+
  Top 0.254: R21.1 32.29,49.78 39.87,49.78 41.14,48.51 41.14,43.94 41.39,43.69 41.39,41.91 41.35,41.87 U$2.21
  Top 0.508: R21.1 C69.1 C66.1
VUSB2
  Top 0.813: SJ1.1 F1.1